# Altium PCB sensor_bottom_1117.PcbDoc
Units mil, origin at the board's own origin, x right, y up, seen from the top; angles counter-clockwise.
Board outline 6000 x 990 mil, 2 copper layers (Top Layer, Bottom Layer); 1 components, 1 nets, 16 pads, 0 vias.
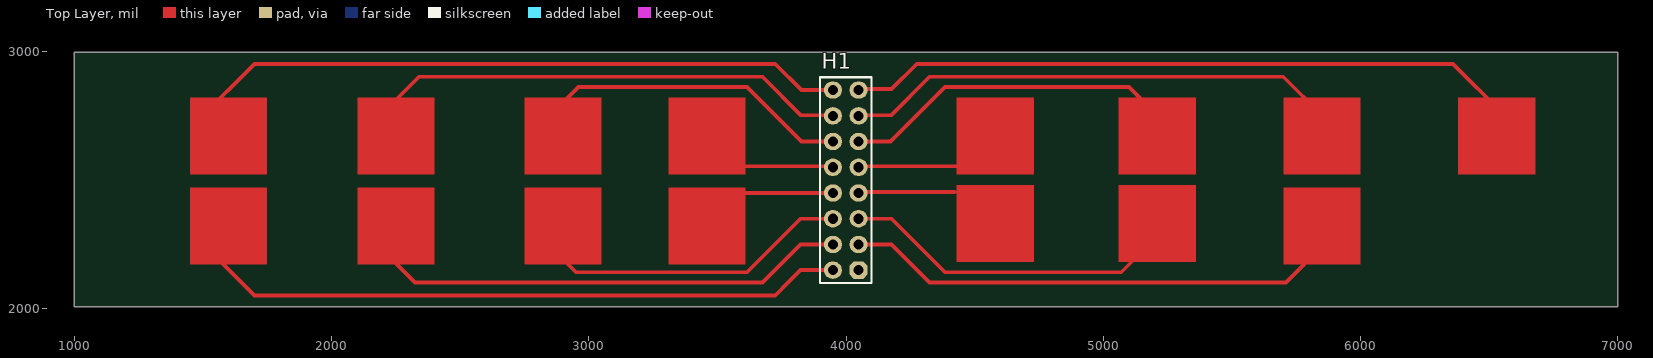
[diagram p0: Top Layer view]
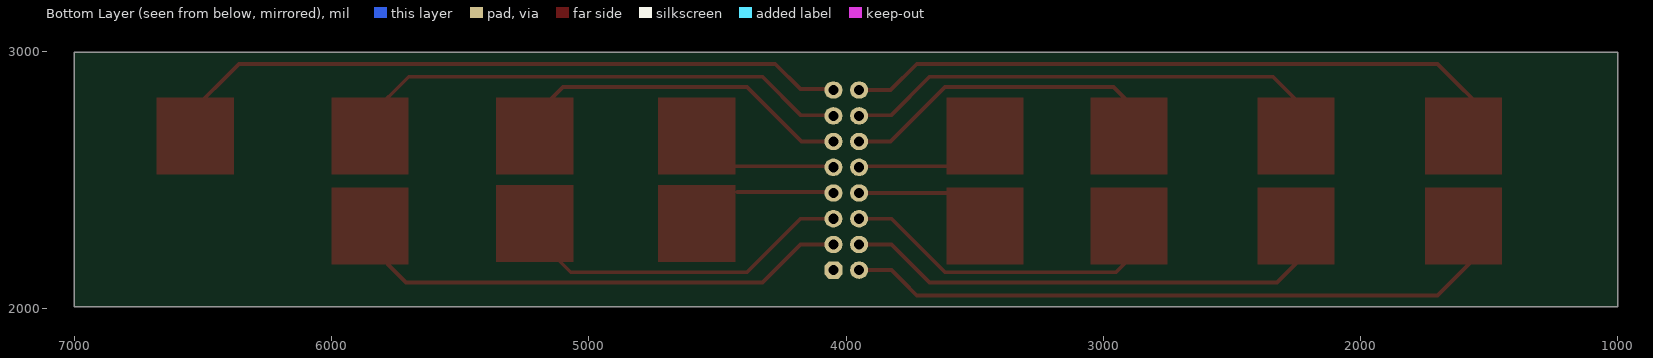
[diagram p1: Bottom Layer view, seen from below]

## Layer stack, top to bottom
Top Solder: solder mask 0.4, Solder Resist, Dk 3.5
Top Layer: signal copper 1.4
Dielectric 1: dielectric 12.6, FR-4, Dk 4.8
Bottom Layer: signal copper 1.4
Bottom Solder: solder mask 0.4, Solder Resist, Dk 3.5

## Board outline
1000,2005 7000,2005 7000,2995 1000,2995
board region "Default Layer Stack Region": 6994.13,2995 7000,2995 7000,2005 6991,2005
board region "Default Layer Stack Region": 6991,2005 1005,2005 1004.91,2995 6994.13,2995
board region "Default Layer Stack Region": 1005,2005 1000,2005 1000,2995 1004.91,2995

## Design rules (kind name [scope] priority, off if disabled: settings)
Clearance [All] p1: gap=10 ignorepadtopadclearanceinfootprint=FALSE except(0: Arc-Hole Track-Hole SMDPad-Hole THPad-Hole Via-Hole Fill-Hole Poly-Hole Region-Hole Text-Hole)
PolygonConnect [All] p1: connectstyle=Relief reliefconductorwidth=10 reliefentries=4 polygonreliefangle="90 Angle" airgapwidth=10
RoutingVias [All] p1: holewidth=28 width=50 viastyle="Through Hole" minholewidth=28 minwidth=50 maxholewidth=28 maxwidth=50
SolderMaskExpansion [All] p1: expansion=4
Width [All] p1: maxlimit=15 minlimit=10 preferedwidth=15
30 further rules are at their usual default settings.

## Components (designator, comment, footprint, x,y, rotation, side; value= is the part's Value field where it differs from the comment)
H1 "HEADER" HD_male_8x2_100mil_straight 3999,2498 r90 top

## Footprints (in the part's own frame and the unit in brackets; to place one, negate y for a bottom-side part, rotate by r counter-clockwise, add the part's x,y. Pads: shape width x height; smd on the part's side, far side on the other; paste and mask are expansions set on the pad)
HD_male_8x2_100mil_straight [mm]
  oct 1.7x1.8 hole 1: 1(-8.89,-1.27)
  oval 1.7x1.8 hole 1: 2(-8.89,1.27) 3(-6.35,-1.27) 4(-6.35,1.27) 5(-3.81,-1.27) 6(-3.81,1.27) 7(-1.27,-1.27) 8(-1.27,1.27) 9(1.27,-1.27) 10(1.27,1.27) 11(3.81,-1.27) 12(3.81,1.27) 13(6.35,-1.27) 14(6.35,1.27) 15(8.89,-1.27) 16(8.89,1.27)
  Mechanical 15 keep-out lines w0.1: -10.16,2.54 10.16,2.54 10.16,-2.54 -10.16,-2.54 -10.16,2.54
  silkscreen extent -10.16,-2.54 10.16,2.54, body extent -10.16,-2.54 10.16,2.54, height 8

## Part data
H1: library part HD_8x2, "Header, 8-pins/row, double row,"

## Nets (pads, with @x,y where several pads share a name; then routed paths per layer and width w, separated by ;. In a path a pad name is that pad's centre, name@x,y a point inside that pad or via, vN(x,y) a via of type N, cw(c..) or ccw(c..) an arc to the next point about the centre after c; other vN are vias at no path point)
GND: H1.1
pads on no net: H1.2 H1.3 H1.4 H1.5 H1.6 H1.7 H1.8 H1.9 H1.10 H1.11 H1.12 H1.13 H1.14 H1.15 H1.16
copper on no net: | length 21870.6
  Top Layer w10: 4049,2852 4052,2852
  Top Layer w15: 1487.5,2737.5 1700,2950 3725,2950 3827,2848 3949,2848 ; 1512.5,2237.5 1700,2050 3725,2050 3779,2104 3823,2148 3949,2148 ; 2195,2755 2340,2900 3675,2900 3825,2750 3940,2750 ; 2200,2250 2200,2225 2325,2100 3675,2100 3823,2248 3949,2248 ; 2850,2750 2905,2805 2960,2860 3615,2860 3827,2648 3949,2648 ; 2857.5,2232.5 2950,2140 3615,2140 3823,2348 3882,2348 3949,2348 ; 3580,2552 3949,2552 ; 3600,2448 3808.75,2448 3902.25,2448 3949,2448 ; 4049,2248 4177,2248 4325,2100 5710,2100 5855,2245 ; 4049,2348 4177,2348 4385,2140 4561.25,2140 4913.75,2140 5070,2140 5177.5,2247.5 ; 4049,2452 4258,2452 4423,2452 ; 4049,2552 4450,2552 ; 4049,2648 4173,2648 4385,2860 5100,2860 5205,2755 ; 4049,2852 4177,2852 4275,2950 6360,2950 6555,2755 ; 4050,2750 4175,2750 4325,2900 5700,2900 5850,2750

## Other copper
Top Layer:
  rectangle: 5700,2170 6000,2470
  rectangle: 5060,2180 5360,2480
  rectangle: 6380,2520 6680,2820
  rectangle: 5700,2520 6000,2820
  rectangle: 5060,2520 5360,2820
  rectangle: 4430,2180 4730,2480
  rectangle: 4430,2520 4730,2820
  rectangle: 1450,2520 1750,2820
  rectangle: 2100,2170 2400,2470
  rectangle: 2100,2520 2400,2820
  rectangle: 2750,2170 3050,2470
  rectangle: 2750,2520 3050,2820
  rectangle: 3310,2170 3610,2470
  rectangle: 3310,2520 3610,2820
  rectangle: 1450,2170 1750,2470